# EAGLE board PCB-1_v7 (EAGLE 9.7.0), part 1 of 2
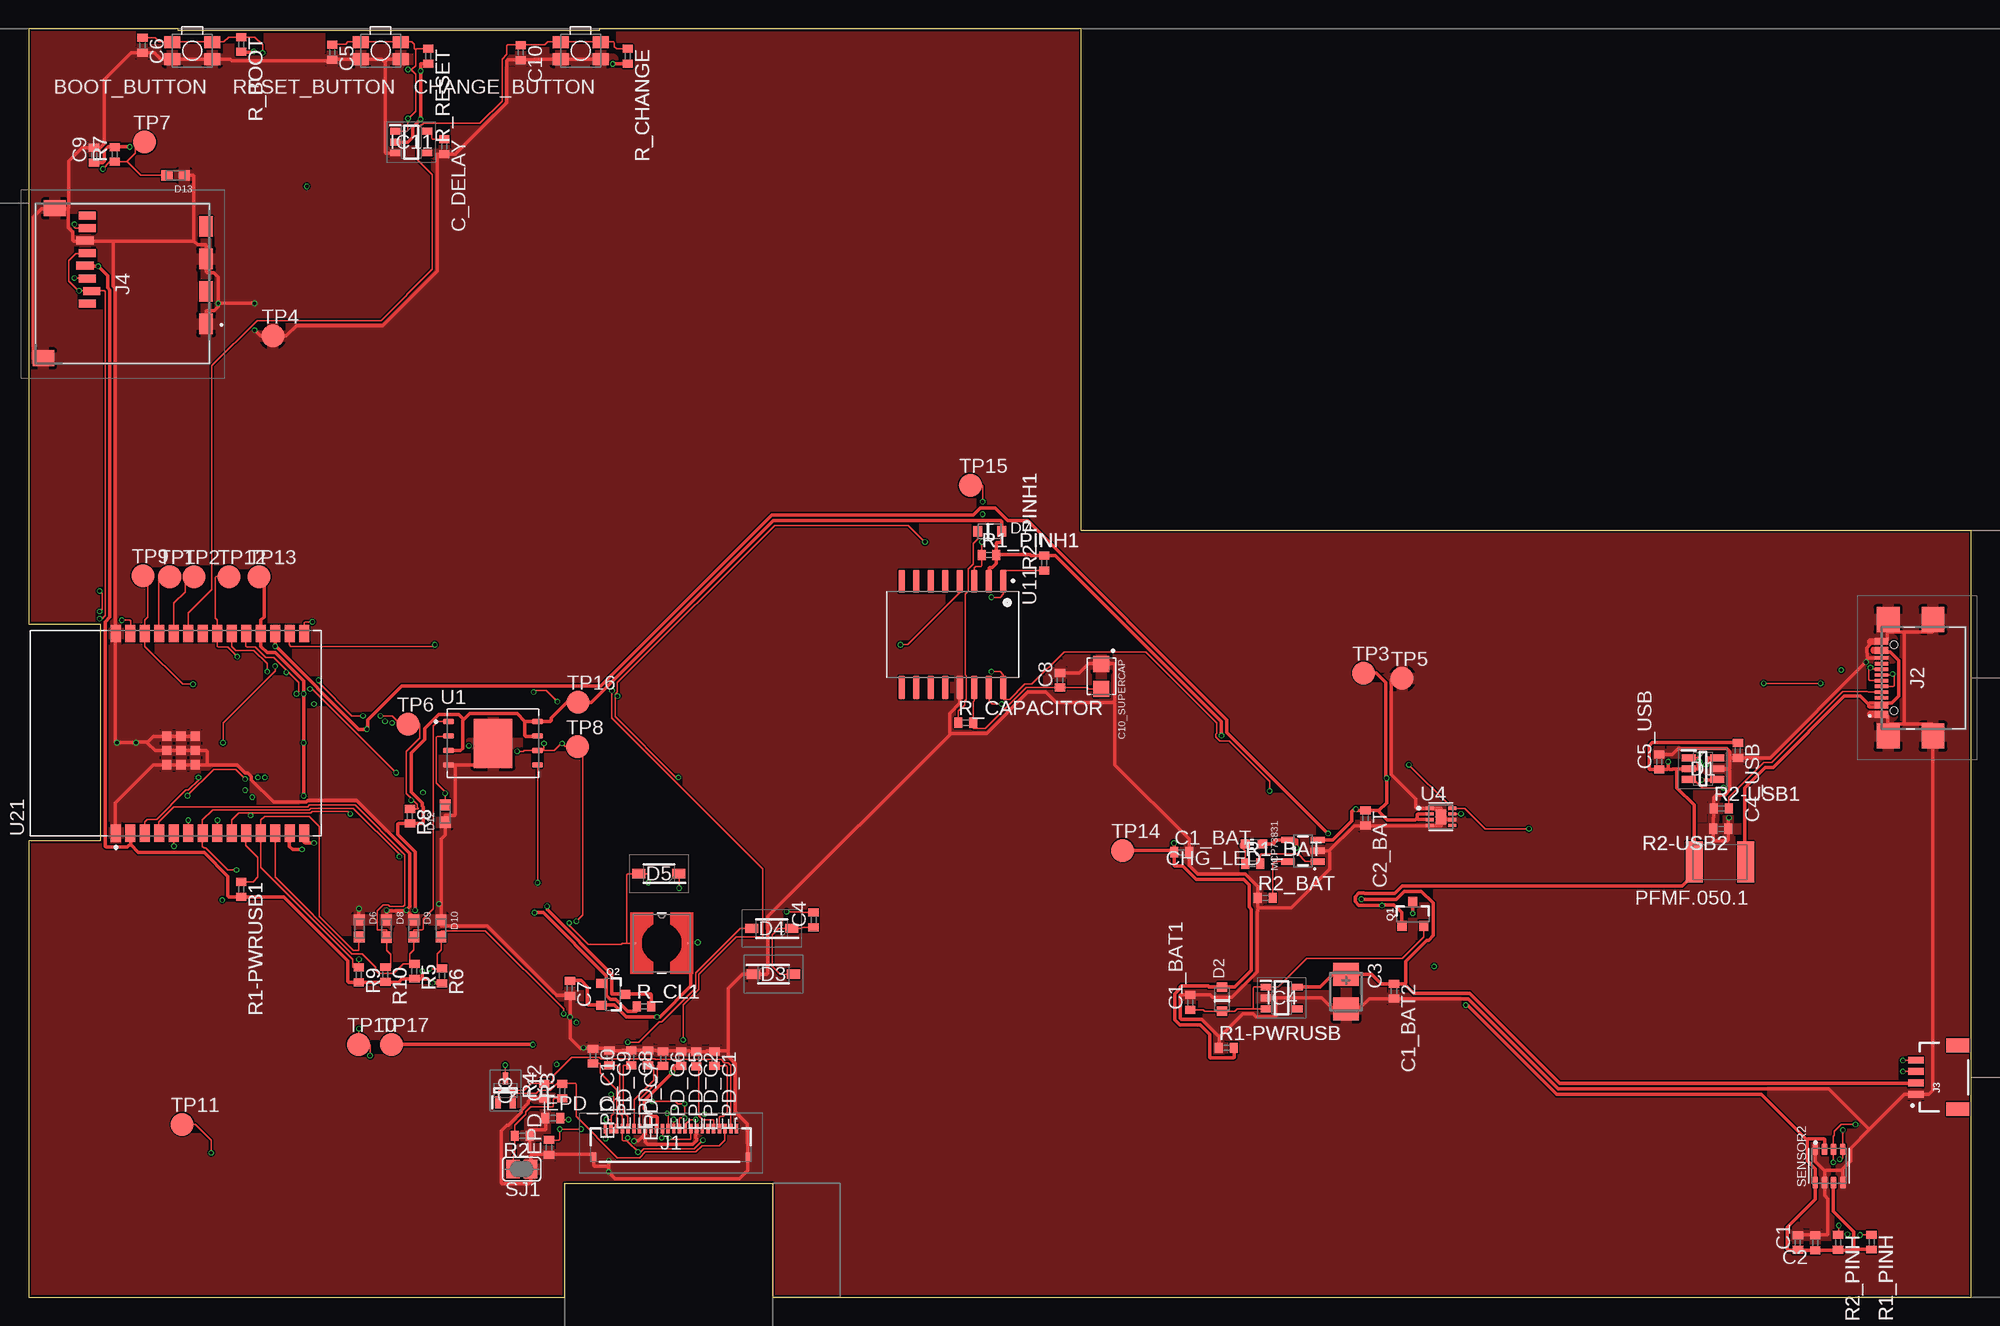
[diagram p0: board, top side]
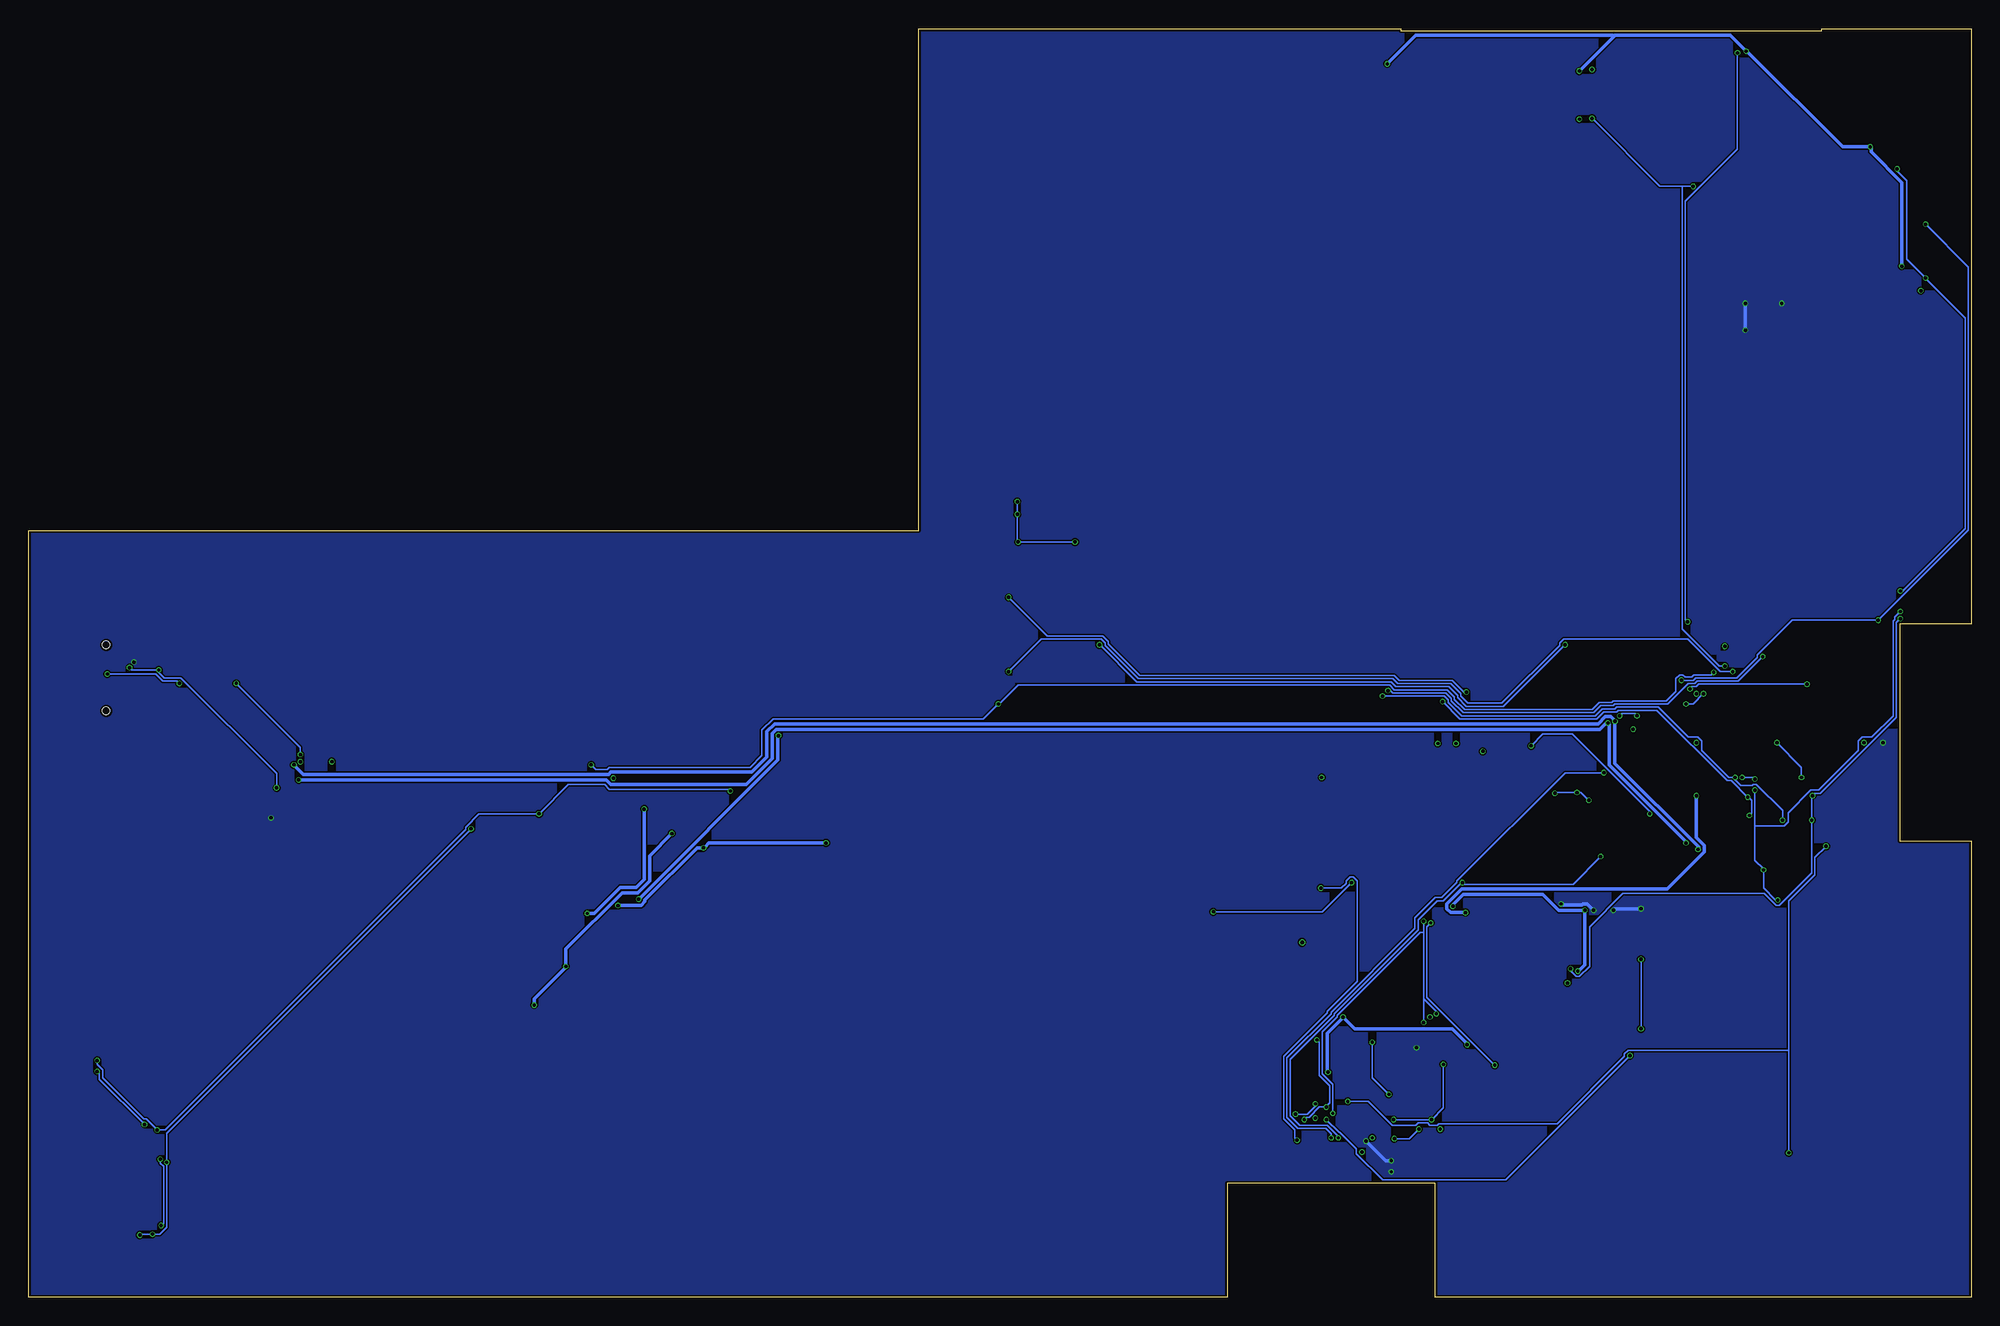
[diagram p1: board, bottom side, seen from below]

Size 170.2 x 111.2 mm. Coordinates in mm from the lower left corner, seen from the top.
Outline: 0,0 46.99,0 46.99,10 65.19,10 65.19,0 170.2,0 170.2,67.2 92.2,67.2 92.2,111.2 50,111.2 50,111 13.1,111 13.1,111.2 0,111.2 0,59 6.3,59 6.3,40 0,40 0,0
Copper layers (1*16): Top 0.035mm / dielectric 1.6mm / Bottom 0.035mm
Design rules "jlcpcb-2layers.dru": minimum track width 5mil, minimum drill 0.3mm, track to track 5mil, track to pad 5mil, pad to pad 5mil, via to via 5mil, smd to smd 5mil, copper to edge 0.2mm, drill to drill 6mil, minimum pad ring 10mil, minimum via ring 3mil, stop-mask expansion 4mil, vias tented up to drill 0mil, thermal gap 10mil
Net classes: 0 default: width 0.15 mm; 1 power: width 0.3 mm

## Footprints (pad centres in the part's own frame; a part is rotated, then mirrored left to right if it is on the bottom)
MYBUTTON = smd 1.4 x 1.05: 1 1.75,0.75; 2 -1.75,0.75; 3 -1.75,-0.75; 4 1.75,-0.75
EAGLE-LTSPICE_C0402 = smd 0.7 x 0.9: 1 -0.65,0; 2 0.65,0
RCL_CT3528 = smd 2 x 2.2: + -1.5,0; - 1.5,0
CAPCP3225X100N = smd 1.4 x 1.4: 1 -1.1,0; 2 1.1,0
ADAFRUIT_CHIP-LED0603 = smd 0.8 x 0.8: A 0,-0.75; C 0,0.75
SOT95P280X145-6N = smd 1.2 x 0.6: 1 -1.25,0.95; 2 -1.25,0; 3 -1.25,-0.95; 4 1.25,-0.95; 5 1.25,0; 6 1.25,0.95
ESP32_WROVER_AVX---SD0805S020S1R0_AVX_SD0805S020S1R0_0 = smd 0.8 x 0.9: 1 -1.05,0; 2 1.05,0
SOD3716X135N = smd 1.15 x 0.8: 1 -1.75,0; 2 1.75,0
DIOC1608X36N = smd 0.97 x 0.94: 1 -0.75,0; 2 0.75,0
SOT95P280X120-5N = smd 0.9 x 0.6: 1 -1.4,0.95; 2 -1.4,0; 3 -1.4,-0.95; 4 1.4,-0.95; 5 1.4,0.95
SOT95P280X125-5N = smd 0.9 x 0.6: 1 -1.4,0.95; 2 -1.4,0; 3 -1.4,-0.95; 4 1.4,-0.95; 5 1.4,0.95
FH34SRJ24S05SH99 = smd 0.3 x 0.8: 1 5.75,1.45; 2 5.25,1.45; 3 4.75,1.45; 4 4.25,1.45; 5 3.75,1.45; 6 3.25,1.45; 7 2.75,1.45; 8 2.25,1.45; 9 1.75,1.45; 10 1.25,1.45; 11 0.75,1.45; 12 0.25,1.45; 13 -0.25,1.45; 14 -0.75,1.45; 15 -1.25,1.45; 16 -1.75,1.45; 17 -2.25,1.45; 18 -2.75,1.45; 19 -3.25,1.45; 20 -3.75,1.45; 21 -4.25,1.45; 22 -4.75,1.45; 23 -5.25,1.45; 24 -5.75,1.45 | smd 0.4 x 0.8: MP1 6.75,-1.05; MP2 -6.75,-1.05
SAMACSYS_PARTS_USB4110GFA = smd 0.3 x 1.15: A1 -3.35,3.678; A4 -2.55,3.678; A5 -1.25,3.678; A6 -0.25,3.678; A7 0.25,3.678; A8 1.25,3.678; A9 2.55,3.678; A12 3.35,3.678; B1 3.05,3.678; B4 2.25,3.678; B5 1.75,3.678; B6 0.75,3.678; B7 -0.75,3.678; B8 -1.75,3.678; B9 -2.25,3.678; B12 -3.05,3.678 | smd 2.18 x 2: MP1 -5.11,-0.827; MP2 5.11,-0.827; MP3 -5.11,3.103; MP4 5.11,3.103 | hole 0.65: -2.89,2.603; 2.89,2.603
JST04_1MM_RA = smd 0.6 x 1.35: 1 -1.5,0; 2 -0.5,0; 3 0.5,0; 4 1.5,0 | smd 1.2 x 2: NC1 2.8,-3.675; NC2 -2.8,-3.675
112ATAARR03ATTEND = smd 1.8 x 1.2: G1 10.6,10.4; G2 4.9,10.4; S1 7.75,10.4; S2 2.05,10.4 | smd 1.4 x 1.9: G3 13.6,-3.85; G4 0.45,-2.85 | smd 0.7 x 1.5: P1 8.8,0; P2 7.7,0.4; P3 6.6,0; P4 5.5,-0.2; P5 4.4,0; P6 3.3,-0.2; P7 2.2,0; P8 1.1,0
IND_4828-WE-TPC_WRE = smd 0.127 x 0.127: 1 -2.286,0; 2 2.286,0
ESP32_WROVER_SPARKFUN-IC-POWER_SOT23-5 = smd 0.55 x 1.2: 1 -0.95,-1.3; 2 0,-1.3; 3 0.95,-1.3; 4 0.95,1.3; 5 -0.95,1.3
ESP32C6_VARISTOR_CT/CN1812 = smd 1.5 x 3.6: 1 -2.25,0; 2 2.25,0
ESP32_WROVER_SPARKFUN-DISCRETESEMI_SOT23-3 = smd 0.8 x 0.9: 1 -0.95,-1; 2 0.95,-1; 3 0,1.1
SOT65P210X110-3N = smd 1.05 x 0.5: 1 -1.05,0.65; 2 -1.05,-0.65; 3 1.05,0
ESP32_WROVER_EAGLE-LTSPICE_R0402 = smd 0.7 x 0.9: 1 -0.65,0; 2 0.65,0
ESP32_WROVER_BME680_PSON80P300X300X100-8N = smd 1.016 x 0.5: 1 1.458,1.2; 2 1.458,0.4; 3 1.458,-0.4; 4 1.458,-1.2; 5 -1.458,-1.22; 6 -1.458,-0.4; 7 -1.458,0.4; 8 -1.458,1.2
SJ = smd 1.168 x 1.6: 1 -0.762,0; 2 0.762,0
TP20R = smd 2 x 2: TP 0,0
SON127P600X800X80-9N = smd 0.94 x 0.44: 1 -3.895,1.905; 2 -3.895,0.635; 3 -3.895,-0.635; 4 -3.895,-1.905; 5 3.895,-1.905; 6 3.895,-0.635; 7 3.895,0.635; 8 3.895,1.905 | smd 3.4 x 4.3: 9 0,0
SON50P200X200X80-9N = smd 0.76 x 0.27: 1 -0.985,0.75; 2 -0.985,0.25; 3 -0.985,-0.25; 4 -0.985,-0.75; 5 0.985,-0.75; 6 0.985,-0.25; 7 0.985,0.25; 8 0.985,0.75 | smd 0.9 x 1.3: 9 0,0
SOIC127P1032X265-16N = smd 2.05 x 0.59: 1 -4.655,4.445; 2 -4.655,3.175; 3 -4.655,1.905; 4 -4.655,0.635; 5 -4.655,-0.635; 6 -4.655,-1.905; 7 -4.655,-3.175; 8 -4.655,-4.445; 9 4.655,-4.445; 10 4.655,-3.175; 11 4.655,-1.905; 12 4.655,-0.635; 13 4.655,0.635; 14 4.655,1.905; 15 4.655,3.175; 16 4.655,4.445
XCVR_ESP32-C6-WROOM-1-N8 = smd 1.5 x 0.9: 1 -8.75,5.26; 2 -8.75,3.99; 3 -8.75,2.72; 4 -8.75,1.45; 5 -8.75,0.18; 6 -8.75,-1.09; 7 -8.75,-2.36; 8 -8.75,-3.63; 9 -8.75,-4.9; 10 -8.75,-6.17; 11 -8.75,-7.44; 12 -8.75,-8.71; 13 -8.75,-9.98; 14 -8.75,-11.25; 15 8.75,-11.25; 16 8.75,-9.98; 17 8.75,-8.71; 18 8.75,-7.44; 19 8.75,-6.17; 20 8.75,-4.9; 21 8.75,-3.63; 22 8.75,-2.36; 23 8.75,-1.09; 24 8.75,0.18; 25 8.75,1.45; 26 8.75,2.72; 27 8.75,3.99; 28 8.75,5.26 | smd 0.8 x 0.8: 29_1 -2.755,0.79; 29_2 -1.505,0.79; 29_3 -0.255,0.79; 29_4 -2.755,-0.46; 29_5 -1.505,-0.46; 29_6 -0.255,-0.46; 29_7 -2.755,-1.71; 29_8 -1.505,-1.71; 29_9 -0.255,-1.71

## Placement (x,y rotation side)
BOOT_BUTTON  BUTTON_CUSYOMV1  [MYBUTTON]  14.34,109.26 180 top
C1  100nF  [EAGLE-LTSPICE_C0402]  154.99,4.81 90 top
C1_BAT  4.7uF  [EAGLE-LTSPICE_C0402]  101.01,39.01 0 top
C1_BAT1  4.7uf  [EAGLE-LTSPICE_C0402]  101.77,25.85 90 top
C1_BAT2  4.7uf  [EAGLE-LTSPICE_C0402]  119.61,26.85 270 top
C2  100nF  [EAGLE-LTSPICE_C0402]  156.52,4.79 90 top
C2_BAT  4.7uF  [EAGLE-LTSPICE_C0402]  117.12,42.01 270 top
C3  100uF TANT  [RCL_CT3528]  115.41,26.8 270 top
C4  100nf  [EAGLE-LTSPICE_C0402]  68.77,33.09 90 top
C4_USB  100nf  [EAGLE-LTSPICE_C0402]  149.74,47.93 270 top
C5  100nF  [EAGLE-LTSPICE_C0402]  26.6,109.12 269.6 top
C5_USB  4.7uf  [EAGLE-LTSPICE_C0402]  142.85,46.93 90 top
C6  100nF  [EAGLE-LTSPICE_C0402]  9.98,109.73 270 top
C7  10uF  [EAGLE-LTSPICE_C0402]  47.42,27.09 270 top
C8  100nF  [EAGLE-LTSPICE_C0402]  90.36,54.09 90 top
C9  100nF  [EAGLE-LTSPICE_C0402]  5.74,100.09 90 top
C10  100nF  [EAGLE-LTSPICE_C0402]  43.12,109.09 270 top
C10_SUPERCAP  CPH3225A  [CAPCP3225X100N]  93.99,54.42 270 top
C_DELAY  100nF  [EAGLE-LTSPICE_C0402]  36.41,100.85 270 top
CHANGE_BUTTON  BUTTON_CUSYOMV1  [MYBUTTON]  48.36,109.26 180 top
CHG_LED  [ADAFRUIT_CHIP-LED0603]  107.34,39.75 90 top
D1  USBLC6-2SC6Y  [SOT95P280X145-6N]  146.68,46.33 0 top
D2  ESP32_WROVER_AVX---SD0805S020S1R0_AVX_SD0805S020S1R0_0_0AVX_SD0805S020S1R0_0_0  [ESP32_WROVER_AVX---SD0805S020S1R0_AVX_SD0805S020S1R0_0]  104.55,26.14 90 top
D3  MBR0530  [SOD3716X135N]  65.26,28.33 0 top
D4  MBR0530  [SOD3716X135N]  65.1,32.33 180 top
D5  MBR0530  [SOD3716X135N]  55.22,37.14 180 top
D6  PGB1010603MR  [DIOC1608X36N]  28.98,32.33 270 top
D7  ESP32_WROVER_AVX---SD0805S020S1R0_AVX_SD0805S020S1R0_0_0AVX_SD0805S020S1R0_0_0  [ESP32_WROVER_AVX---SD0805S020S1R0_AVX_SD0805S020S1R0_0]  84.2,67.14 0 top
D8  PGB1010603MR  [DIOC1608X36N]  31.36,32.33 270 top
D9  PGB1010603MR  [DIOC1608X36N]  33.74,32.33 270 top
D10  PGB1010603MR  [DIOC1608X36N]  36.12,32.33 270 top
D12  PGB1010603MR  [DIOC1608X36N]  36.5,42.4 90 top
D13  PGB1010603MR  [DIOC1608X36N]  12.88,98.33 180 top
EPD_C1  1uF/50V  [EAGLE-LTSPICE_C0402]  60.1,20.93 270 top
EPD_C2  1uF/50V  [EAGLE-LTSPICE_C0402]  58.5,20.9 270 top
EPD_C5  1uF/50V  [EAGLE-LTSPICE_C0402]  57.18,20.93 270 top
EPD_C6  1uF/50V  [EAGLE-LTSPICE_C0402]  55.59,20.93 270 top
EPD_C7  1uF/50V  [EAGLE-LTSPICE_C0402]  54.26,21.01 270 top
EPD_C8  1uF/50V  [EAGLE-LTSPICE_C0402]  52.79,21.01 270 top
EPD_C9  1uF/50V  [EAGLE-LTSPICE_C0402]  50.9,20.98 270 top
EPD_C10  1uF/50V  [EAGLE-LTSPICE_C0402]  49.45,21.15 270 top
EPD_C11  1uF/50V  [EAGLE-LTSPICE_C0402]  45.93,15.72 0 top
EPD_C12  1uF/50V  [EAGLE-LTSPICE_C0402]  45.59,13.15 90 top
IC4  XC6220A331MR-G  [SOT95P280X120-5N]  109.77,26.25 0 top
IC11  BD5229G-TR  [SOT95P280X125-5N]  33.53,101.25 0 top
J1  FH34SRJ-24S-0.5SH_99_  [FH34SRJ24S05SH99]  56.27,13.35 0 top
J2  SAMACSYS_PARTS_USB4110-GF-A  [SAMACSYS_PARTS_USB4110GFA]  166,54.3 90 top
J3  QWIIC_RIGHT_ANGLE  [JST04_1MM_RA]  165.32,19.3 90 top
J4  112A-TAAR-R03_ATTEND  [112ATAARR03ATTEND]  5.15,95.9 270 top
L1  68uH  [IND_4828-WE-TPC_WRE]  55.47,31.05 0 top
MCP73831  [ESP32_WROVER_SPARKFUN-IC-POWER_SOT23-5]  111.64,39.15 90 top
PFMF.050.1  [ESP32C6_VARISTOR_CT/CN1812]  148.17,38.15 180 top
Q1  20V/4.2A/52mΩ/1.4W  [ESP32_WROVER_SPARKFUN-DISCRETESEMI_SOT23-3]  121.26,33.56 0 top
Q2  20V/4.2A/52mΩ/1.4W  [ESP32_WROVER_SPARKFUN-DISCRETESEMI_SOT23-3]  51.18,26.56 270 top
Q3  SI1308EDL-T1-GE3  [SOT65P210X110-3N]  41.77,18.14 90 top
R1-PWRUSB  100K  [ESP32_WROVER_EAGLE-LTSPICE_R0402]  104.93,21.88 0 top
R1-PWRUSB1  100K  [ESP32_WROVER_EAGLE-LTSPICE_R0402]  18.63,35.77 270 top
R1_BAT  200  [ESP32_WROVER_EAGLE-LTSPICE_R0402]  107.23,38.01 0 top
R1_PINH  10K  [ESP32_WROVER_EAGLE-LTSPICE_R0402]  161.45,4.85 270 top
R1_PINH1  10K  [ESP32_WROVER_EAGLE-LTSPICE_R0402]  84.14,65.07 0 top
R2  2.2  [ESP32_WROVER_EAGLE-LTSPICE_R0402]  43.25,14.17 180 top
R2-USB1  5K1  [ESP32_WROVER_EAGLE-LTSPICE_R0402]  148.29,42.85 0 top
R2-USB2  5K1  [ESP32_WROVER_EAGLE-LTSPICE_R0402]  148.25,41.07 180 top
R2_BAT  2K  [ESP32_WROVER_EAGLE-LTSPICE_R0402]  108.34,35.01 0 top
R2_PINH  10K  [ESP32_WROVER_EAGLE-LTSPICE_R0402]  158.52,4.82 270 top
R2_PINH1  10K  [ESP32_WROVER_EAGLE-LTSPICE_R0402]  88.98,64.37 90 top
R3  0.47  [ESP32_WROVER_EAGLE-LTSPICE_R0402]  46.76,18.09 90 top
R4  10K  [ESP32_WROVER_EAGLE-LTSPICE_R0402]  45.18,18.09 90 top
R5  10K  [ESP32_WROVER_EAGLE-LTSPICE_R0402]  33.8,28.59 270 top
R6  10K  [ESP32_WROVER_EAGLE-LTSPICE_R0402]  36.22,28.19 270 top
R7  10K  [ESP32_WROVER_EAGLE-LTSPICE_R0402]  7.55,100.17 90 top
R8  10K  [ESP32_WROVER_EAGLE-LTSPICE_R0402]  33.41,42.17 270 top
R9  10K  [ESP32_WROVER_EAGLE-LTSPICE_R0402]  28.93,28.27 270 top
R10  10K  [ESP32_WROVER_EAGLE-LTSPICE_R0402]  31.26,28.3 270 top
R_BOOT  10K  [ESP32_WROVER_EAGLE-LTSPICE_R0402]  18.63,109.8 270 top
R_CAPACITOR  10K  [ESP32_WROVER_EAGLE-LTSPICE_R0402]  82.1,50.37 0 top
R_CHANGE  10K  [ESP32_WROVER_EAGLE-LTSPICE_R0402]  52.5,108.77 270 top
R_CL1  10K  [ESP32_WROVER_EAGLE-LTSPICE_R0402]  53.92,25.51 0 top
R_RESET  10K  [ESP32_WROVER_EAGLE-LTSPICE_R0402]  35.02,108.77 270 top
RESET_BUTTON  BUTTON_CUSYOMV1  [MYBUTTON]  30.85,109.26 180 top
SENSOR2  BME688  [ESP32_WROVER_BME680_PSON80P300X300X100-8N]  157.72,11.53 90 top
SJ1  [SJ]  43.2,11.25 180 top
TP1  TPTP20R  [TP20R]  12.37,63.17 0 top
TP2  TPTP20R  [TP20R]  14.5,63.17 0 top
TP3  TPTP20R  [TP20R]  116.96,54.72 0 top
TP4  TPTP20R  [TP20R]  21.41,84.25 0 top
TP5  TPTP20R  [TP20R]  120.33,54.25 0 top
TP6  TPTP20R  [TP20R]  33.25,50.25 0 top
TP7  TPTP20R  [TP20R]  10.17,101.25 0 top
TP8  TPTP20R  [TP20R]  48.09,48.25 0 top
TP9  TPTP20R  [TP20R]  10.01,63.25 0 top
TP10  TPTP20R  [TP20R]  28.9,22.17 0 top
TP11  TPTP20R  [TP20R]  13.45,15.17 0 top
TP12  TPTP20R  [TP20R]  17.55,63.17 0 top
TP13  TPTP20R  [TP20R]  20.2,63.17 0 top
TP14  TPTP20R  [TP20R]  95.85,39.17 0 top
TP15  TPTP20R  [TP20R]  82.5,71.17 0 top
TP16  TPTP20R  [TP20R]  48.15,52.17 0 top
TP17  TPTP20R  [TP20R]  31.8,22.17 0 top
U1  W25Q512JVEIQ  [SON127P600X800X80-9N]  40.69,48.56 0 top
U4  MAX17048G+T10  [SON50P200X200X80-9N]  123.73,42.12 0 top
U11  DS3231SN#  [SOIC127P1032X265-16N]  80.95,58.1 270 top
U21  ESP32-C6-WROOM-1-N8  [XCVR_ESP32-C6-WROOM-1-N8]  12.9,49.44 90 top

## Library data of the parts
BOOT_BUTTON CHANGE_BUTTON CHG_LED PFMF.050.1 RESET_BUTTON SJ1 TP1-TP17 = DeskAssistant v19 v1
C1 C1_BAT C1_BAT1 C1_BAT2 C2 C2_BAT C4 C4_USB C5 C5_USB C6-C10 C_DELAY EPD_C1 EPD_C2 EPD_C5-EPD_C12 = DeskAssistant v19 v1; SPICEMODEL: NONE; SPICEPREFIX: C
C3 = DeskAssistant v19 v1; SPICEPREFIX: C
C10_SUPERCAP = DeskAssistant v19 v1; AVAILABILITY: Not in stock; CHECK_PRICES: https://www.snapeda.com/parts/CPH3225A/Seiko+Instruments/view-part/?ref=eda; DESCRIPTION: 11 mF (EDLC) Supercapacitor 3.3 V 1210 (3225 Metric) - -; MF: Seiko Instruments; MP: CPH3225A; PACKAGE: 1210 Seiko; PRICE: None; PURCHASE-URL: https://www.snapeda.com/api/url_track_click_mouser/?unipart_id=562593&manufacturer=Seiko Instruments&part_name=CPH3225A&search_term=None; SNAPEDA_LINK: https://www.snapeda.com/parts/CPH3225A/Seiko+Instruments/view-part/?ref=snap
D1 = DeskAssistant v19 v1; AVAILABILITY: In Stock; CHECK_PRICES: https://www.snapeda.com/parts/USBLC6-2SC6Y/STMicroelectronics/view-part/?ref=eda; DESCRIPTION: 17V Clamp 5A (8/20µs) Ipp Tvs Diode Surface Mount SOT-23-6; MF: STMicroelectronics; MP: USBLC6-2SC6Y; PACKAGE: SOT-23-6 STMicroelectronics; PRICE: None; SNAPEDA_LINK: https://www.snapeda.com/parts/USBLC6-2SC6Y/STMicroelectronics/view-part/?ref=snap
D2 D7 = DeskAssistant v19 v1; CENTROID_NOT_SPECIFIED: No; DATASHEET: http://datasheets.avx.com/schottky.pdf; DIGIKEY_DESCRIPTION: DIODE SCHOTTKY 20V 1A 0805; DIGIKEY_PART_NUMBER: 478-7800-1-ND; FOOTPRINT: SD0805S020S1R0; LEAD_FREE: yes; MF: AVX; MOUSER_PART_NUMBER: 581-SD0805S020S1R0; PACKAGE: 0805 (2012 metric); PREFIX: D; ROHS: yes; TEMPERATURE_RANGE_HIGH: +125°C; TEMPERATURE_RANGE_LOW: -55°C
D3-D5 = DeskAssistant v19 v1; AVAILABILITY: In Stock; CHECK_PRICES: https://www.snapeda.com/parts/MBR0530/Onsemi/view-part/?ref=eda; DESCRIPTION: Diode Schottky 30 V 500mA Surface Mount SOD-123; MF: ON Semiconductor; MP: MBR0530; PACKAGE: SOD-123-2 ON Semiconductor; PRICE: None; PURCHASE-URL: https://www.snapeda.com/api/url_track_click_mouser/?unipart_id=179458&manufacturer=ON Semiconductor&part_name=MBR0530&search_term=None; SNAPEDA_LINK: https://www.snapeda.com/parts/MBR0530/Onsemi/view-part/?ref=snap
D6 D8-D10 D12 D13 = DeskAssistant v19 v1; AVAILABILITY: In Stock; CHECK_PRICES: https://www.snapeda.com/parts/PGB1010603MR/Littelfuse/view-part/?ref=eda; DESCRIPTION: 150V (Typ) Clamp - Ipp Tvs Diode Surface Mount 0603 (1608 Metric); MF: Littelfuse Inc.; MP: PGB1010603MR; PACKAGE: 0603 Littelfuse Inc.; PRICE: None; PURCHASE-URL: https://www.snapeda.com/api/url_track_click_mouser/?unipart_id=5659453&manufacturer=Littelfuse Inc.&part_name=PGB1010603MR&search_term=None; SNAPEDA_LINK: https://www.snapeda.com/parts/PGB1010603MR/Littelfuse/view-part/?ref=snap
IC4 = DeskAssistant v19 v1; DESCRIPTION: LDO Voltage Regulators; HEIGHT: 1.2mm; MANUFACTURER_NAME: Torex; MANUFACTURER_PART_NUMBER: XC6220A331MR-G; MOUSER_PART_NUMBER: 865-XC6220A331MR-G; MOUSER_PRICE-STOCK: https://www.mouser.co.uk/ProductDetail/Torex-Semiconductor/XC6220A331MR-G?qs=AsjdqWjXhJ8ZSWznL1J0gg%3D%3D
IC11 = DeskAssistant v19 v1; DESCRIPTION: Voltage Detector with Adjustable Delay Time: CMOS processes are utilized to develop high precision, low current consumption CMOS reset ICs that allow arbitrary setting of the delay time. The extensive lineup includes both Nch Open Drain and CMOS output types in a wide range of detection voltages (from 2.3V to 6.0V, in 0.1V steps), enabling selection of the ideal solution based on customer requirements. In addition, the entire series is of course both lead-free and RoHS-compliant.; HEIGHT: 1.25mm; MANUFACTURER_NAME: ROHM Semiconductor; MANUFACTURER_PART_NUMBER: BD5229G-TR; MOUSER_PART_NUMBER: 755-BD5229G-TR; MOUSER_PRICE-STOCK: https://www.mouser.co.uk/ProductDetail/ROHM-Semiconductor/BD5229G-TR?qs=4kLU8WoGk0vvnhrrYwdszw%3D%3D
J1 = DeskAssistant v19 v1; DESCRIPTION: 24 Position FFC, FPC Connector Contacts, Top and Bottom 0.020" (0.50mm) Surface Mount, Right Angle; HEIGHT: 1.1mm; MANUFACTURER_NAME: Hirose; MANUFACTURER_PART_NUMBER: FH34SRJ-24S-0.5SH(99); MOUSER_PART_NUMBER: 798-FH34SRJ24S05SH99; MOUSER_PRICE-STOCK: https://www.mouser.co.uk/ProductDetail/Hirose-Connector/FH34SRJ-24S-0.5SH99?qs=vcbW%252B4%252BSTIpKBl5ap9J8Fw%3D%3D
J2 = DeskAssistant v19 v1; DESCRIPTION: CONN USB 2.0 TYPE-C R/A SMT; HEIGHT: 3.26mm; MANUFACTURER_NAME: GCT (GLOBAL CONNECTOR TECHNOLOGY); MANUFACTURER_PART_NUMBER: USB4110-GF-A; MOUSER_PART_NUMBER: 640-USB4110-GF-A; MOUSER_PRICE-STOCK: https://www.mouser.co.uk/ProductDetail/GCT/USB4110-GF-A?qs=KUoIvG%2F9IlYiZvIXQjyJeA%3D%3D
J3 = DeskAssistant v19 v1; PROD_ID: CONN-13694
J4 = DeskAssistant v19 v1; DESCRIPTION: Micro SD Card Socket, Push-Push Type, Top Mount, SMT, H=1.83mm, 10u; HEIGHT: 1.9mm; MANUFACTURER_NAME: ATTEND; MANUFACTURER_PART_NUMBER: 112A-TAAR-R03 ATTEND
L1 = DeskAssistant v19 v1; COPYRIGHT: Copyright (C) 2024 Ultra Librarian. All rights reserved.; MANUFACTURER_PART_NUMBER: 744043680; MFR_NAME: Wurth Electronics
MCP73831 = DeskAssistant v19 v1; PROD_ID: IC-09995
Q1 Q2 = DeskAssistant v19 v1; FOOTPRINT: DMG2305UX-7; PROD_ID: TRAN-14388
Q3 = DeskAssistant v19 v1; AVAILABILITY: In Stock; CHECK_PRICES: https://www.snapeda.com/parts/SI1308EDL-T1-GE3/Vishay+Siliconix/view-part/?ref=eda; DESCRIPTION: Si1308EDL-T1-GE3 N-channel MOSFET Transistor, 1.5 A, 30 V, 3-Pin SC-70 | Siliconix / Vishay SI1308EDL-T1-GE3; MF: Vishay Siliconix; MP: SI1308EDL-T1-GE3; PACKAGE: SOT-323 Vishay Semiconductor; PRICE: None; PURCHASE-URL: https://www.snapeda.com/api/url_track_click_mouser/?unipart_id=274603&manufacturer=Vishay Siliconix&part_name=SI1308EDL-T1-GE3&search_term=None; SNAPEDA_LINK: https://www.snapeda.com/parts/SI1308EDL-T1-GE3/Vishay+Siliconix/view-part/?ref=snap
R1-PWRUSB R1-PWRUSB1 R1_BAT R1_PINH R1_PINH1 R2 R2-USB1 R2-USB2 R2_BAT R2_PINH R2_PINH1 R3-R10 R_BOOT R_CAPACITOR R_CHANGE R_CL1 R_RESET = DeskAssistant v19 v1; SPICEMODEL: NONE; SPICEPREFIX: R
SENSOR2 = DeskAssistant v19 v1; AVAILABILITY: Unavailable; DESCRIPTION: Integrated Environmental Unit; MF: Bosch Sensortec; MP: BME680; PACKAGE: LGA-8 Bosch Tools; PRICE: None
U1 = DeskAssistant v19 v1; AVAILABILITY: In Stock; CHECK_PRICES: https://www.snapeda.com/parts/W25Q512JVEIQ/Winbond+Electronics/view-part/?ref=eda; DESCRIPTION: FLASH - NOR Memory IC 512Mb (64M x 8) SPI - Quad I/O 133 MHz 8-WSON (8x6); MF: Winbond Electronics; MP: W25Q512JVEIQ; PACKAGE: Package; PRICE: None; SNAPEDA_LINK: https://www.snapeda.com/parts/W25Q512JVEIQ/Winbond+Electronics/view-part/?ref=snap
U4 = DeskAssistant v19 v1; AVAILABILITY: In Stock; CHECK_PRICES: https://www.snapeda.com/parts/MAX17048G+T10/Analog+Devices/view-part/?ref=eda; DESCRIPTION: 3µA 1-Cell/2-Cell Fuel Gauge with ModelGauge; MF: Analog Devices; MP: MAX17048G+T10; PACKAGE: TDFN-8 Maxim; PRICE: None; PURCHASE-URL: https://www.snapeda.com/api/url_track_click_mouser/?unipart_id=329239&manufacturer=Analog Devices&part_name=MAX17048G+T10&search_term=None; SNAPEDA_LINK: https://www.snapeda.com/parts/MAX17048G+T10/Analog+Devices/view-part/?ref=snap
U11 = DeskAssistant v19 v1; AVAILABILITY: In Stock; CHECK_PRICES: https://www.snapeda.com/parts/DS3231SN%23/Analog+Devices/view-part/?ref=eda; DESCRIPTION: Extremely Accurate I²C-Integrated RTC/TCXO/Crystal; MF: Analog Devices; MP: DS3231SN#; PACKAGE: SOIC-16 Maxim; PRICE: None; PURCHASE-URL: https://www.snapeda.com/api/url_track_click_mouser/?unipart_id=99048&manufacturer=Analog Devices&part_name=DS3231SN#&search_term=None; SNAPEDA_LINK: https://www.snapeda.com/parts/DS3231SN%23/Analog+Devices/view-part/?ref=snap
U21 = DeskAssistant v19 v1; AVAILABILITY: In Stock; CHECK_PRICES: https://www.snapeda.com/parts/ESP32-C6-WROOM-1-N8/Espressif+Systems/view-part/?ref=eda; DESCRIPTION: Multiprotocol Modules ESP32-C6 module, Wi-Fi 6 in 2.4 GHz band, Bluetooth 5, Zigbee 3.0 and Thread. ESP34-WROOM Compatible - ENGINEERING SAMPLE; MF: Espressif Systems; MP: ESP32-C6-WROOM-1-N8; PACKAGE: None; PRICE: None; SNAPEDA_LINK: https://www.snapeda.com/parts/ESP32-C6-WROOM-1-N8/Espressif+Systems/view-part/?ref=snap

## Nets
3V3 [power]: C1_BAT2.1 C3.+ C9.1 D7.2 IC4.5 IC11.2 J3.2 J4.P4 Q2.3 R1-PWRUSB1.2 R1_PINH1.2 R2_PINH1.2 R5.2 R6.2 R7.2 R8.2 R9.2 R10.2 R_BOOT.2 R_CHANGE.2 R_CL1.2 R_RESET.2 TP16.TP U1.3 U1.7 U1.8 U11.2 U21.2
32KHZ: R2_PINH1.1 U11.1 U21.9
DN: D1.1 J2.A7 J2.B7
DP: D1.3 J2.A6 J2.B6
EPD_3V3 [power]: C7.1 EPD_C5.2 J1.15 J1.16 L1.2 Q2.2 TP17.TP
EPD_3V3_C [power]: Q2.1 R_CL1.1 TP13.TP U21.18
EPD_BUSY: J1.9 TP9.TP U21.26
EPD_CS: D6.2 J1.12 R9.1 TP10.TP U21.11
EPD_DC: J1.11 TP11.TP U21.5
EPD_RST: J1.10 TP12.TP U21.21
FLASH_CS: D9.2 R5.1 U1.1 U21.12
GDR: J1.2 Q3.1 R4.2
GND [power]: BOOT_BUTTON.1 BOOT_BUTTON.2 C1.2 C1_BAT1.2 C1_BAT2.2 C1_BAT.2 C2.2 C2_BAT.2 C3.- C4_USB.2 C5.2 C5_USB.2 C6.2 C7.2 C8.2 C9.2 C10.2 C10_SUPERCAP.1 C_DELAY.2 CHANGE_BUTTON.1 CHANGE_BUTTON.2 D1.5 D3.1 D6.1 D8.1 D9.1 D10.1 D12.1 D13.1 EPD_C1.1 EPD_C2.1 EPD_C5.1 EPD_C6.1 EPD_C7.1 EPD_C8.1 EPD_C9.1 EPD_C10.1 EPD_C11.1 EPD_C12.1 IC4.2 IC11.3 J1.8 J1.17 J1.MP1 J1.MP2 J2.A1 J2.A12 J2.B1 J2.B5 J2.B12 J2.MP1 J2.MP2 J2.MP3 J2.MP4 J3.1 J4.G1 J4.G2 J4.G3 J4.G4 J4.P6 MCP73831.2 R1-PWRUSB.1 R2-USB1.1 R2-USB2.1 R2-USB2.2 R2.1 R2_BAT.1 R4.1 RESET_BUTTON.1 RESET_BUTTON.2 SENSOR2.1 SENSOR2.5 SENSOR2.7 SJ1.1 TP4.TP TP5.TP U1.4 U1.9 U4.1 U4.4 U4.6 U4.9 U11.13 U21.1 U21.28 U21.29_1 U21.29_2 U21.29_3 U21.29_4 U21.29_5 U21.29_6 U21.29_7 U21.29_8 U21.29_9
GPIO8: R1-PWRUSB1.1 U21.10
I2C_PW [power]: C1.1 C2.1 R1_PINH.2 R2_PINH.2 SENSOR2.2 SENSOR2.6 SENSOR2.8 U21.17
INT_RTC: R1_PINH1.1 TP15.TP U11.3 U21.8
IO/BOOT: BOOT_BUTTON.3 BOOT_BUTTON.4 C6.1 R_BOOT.1 U21.15
IO/CHANGE: C10.1 CHANGE_BUTTON.3 CHANGE_BUTTON.4 R_CHANGE.1 U21.23
MISO: D12.2 J4.P7 R8.1 TP6.TP U1.2 U21.27
MOSI: D13.2 J1.14 J4.P3 R7.1 TP7.TP U1.5 U21.7
N$3: J2.A5 R2-USB1.2
N$4: C1_BAT1.1 D2.1 IC4.1 IC4.3 Q1.2
N$6: EPD_C12.2 J1.24
N$7: CHG_LED.C R1_BAT.1
N$9: C4.1 D3.2 D4.1
N$10: MCP73831.1 R1_BAT.2
N$13: MCP73831.5 R2_BAT.2
N$15: EPD_C10.2 J1.22
N$16: C_DELAY.1 IC11.5
N$17: EPD_C8.2 J1.20
N$18: EPD_C6.2 J1.18
N$19: EPD_C7.2 J1.19
N$20: D7.1 R_CAPACITOR.1
N$27: EPD_C2.2 J1.5
N$28: EPD_C1.2 J1.4
PREVGH: D5.1 EPD_C9.2 J1.21
PREVGL: D4.2 EPD_C11.2 J1.23
RESE: J1.3 Q3.2 R3.2
RESE': R2.2 R3.1 SJ1.2
RESET: C5.1 IC11.1 R_RESET.1 RESET_BUTTON.3 RESET_BUTTON.4 U21.3
RTC_RST: U11.4 U21.16
RX: TP2.TP U21.24
SCK: D10.2 J1.13 J4.P2 J4.P5 R6.1 TP8.TP U1.6 U21.6
SCL: J3.4 R2_PINH.1 SENSOR2.4 U4.7 U11.16 U21.20
SDA: J3.3 R1_PINH.1 SENSOR2.3 U4.8 U11.15 U21.19
SRC: C4.2 D5.2 L1.1 Q3.3
SS_SD: D8.2 R10.1 U21.4
TX: TP1.TP U21.25
USB_D+ [power]: D1.4 U21.14
USB_D- [power]: D1.6 U21.13
VBAT [power]: C2_BAT.1 MCP73831.3 Q1.3 TP3.TP U4.2 U4.3
VBUS [power]: C1_BAT.1 C4_USB.1 C5_USB.1 CHG_LED.A D1.2 D2.2 MCP73831.4 PFMF.050.1.2 Q1.1 R1-PWRUSB.2 TP14.TP
VRTC: C8.1 C10_SUPERCAP.2 R_CAPACITOR.2 U11.14
VUSB [power]: J2.A4 J2.A9 J2.B4 J2.B9 PFMF.050.1.1